# Altium PCB msp_mcu.PcbDoc
Units mil, origin at the board's own origin, x right, y up, seen from the top; angles counter-clockwise.
Board outline 3068 x 1377 mil, 4 copper layers (Top Layer, Signal Layer 1, Signal Layer 2, Bottom Layer), stack 30.634 mil thick; 48 components, 57 nets, 361 pads, 0 vias.
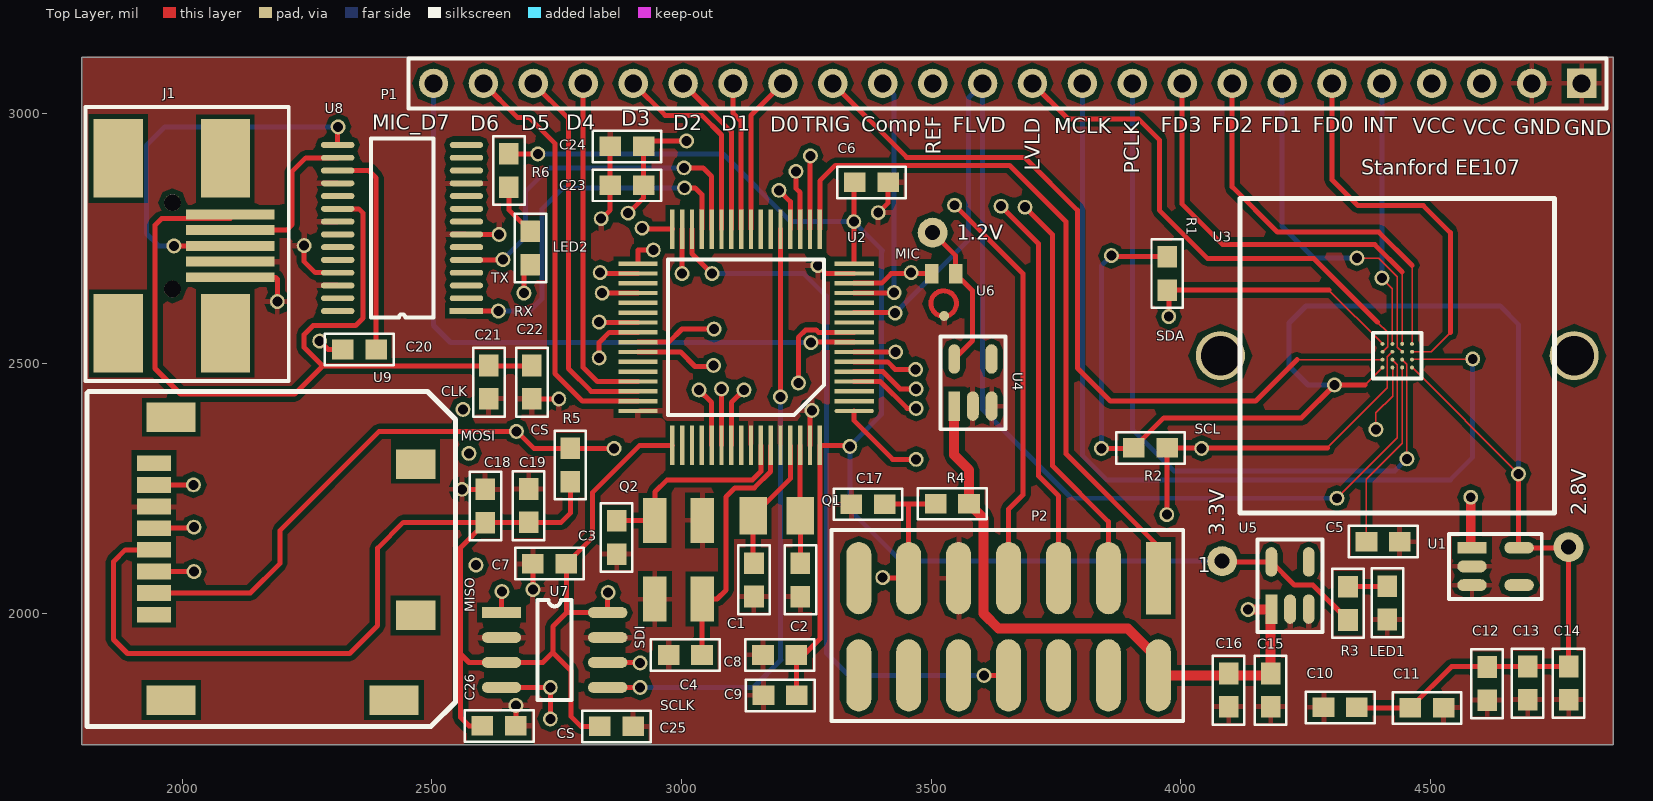
[diagram p0: Top Layer view]
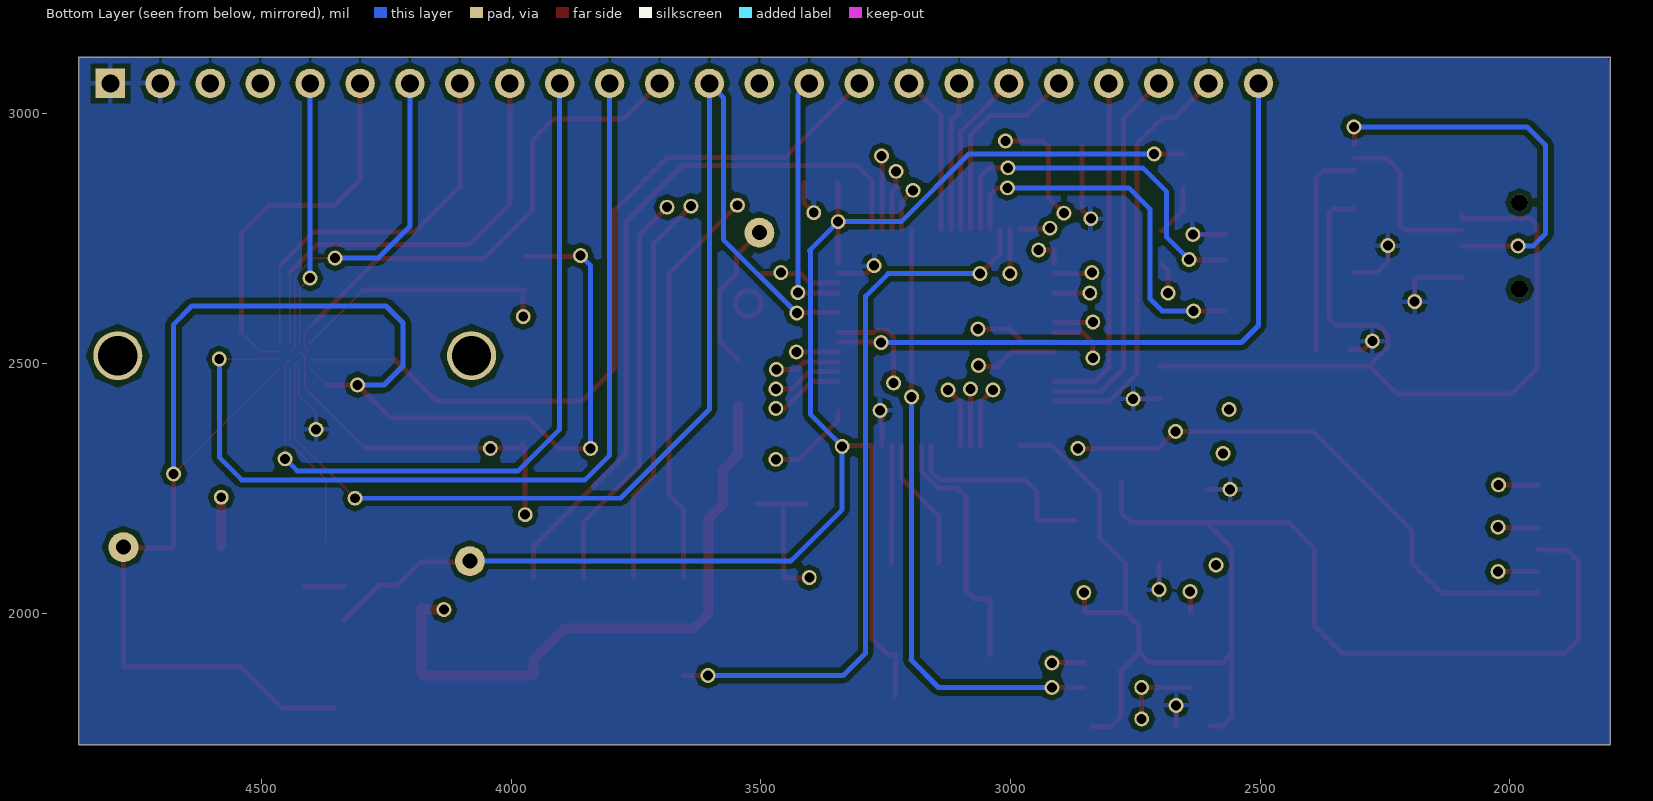
[diagram p1: Bottom Layer view, seen from below]
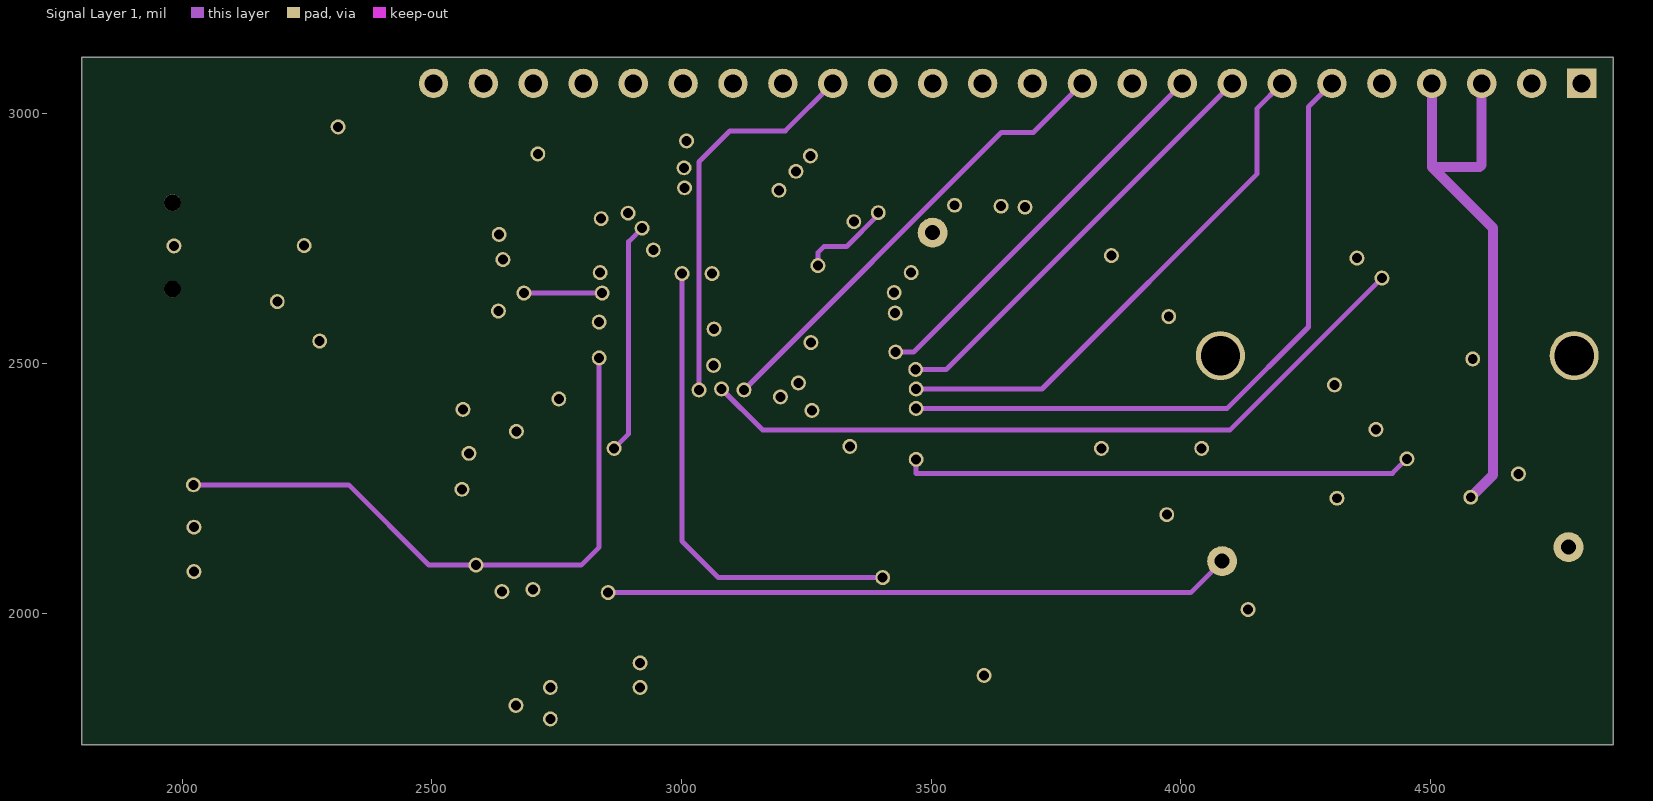
[diagram p2: Signal Layer 1]
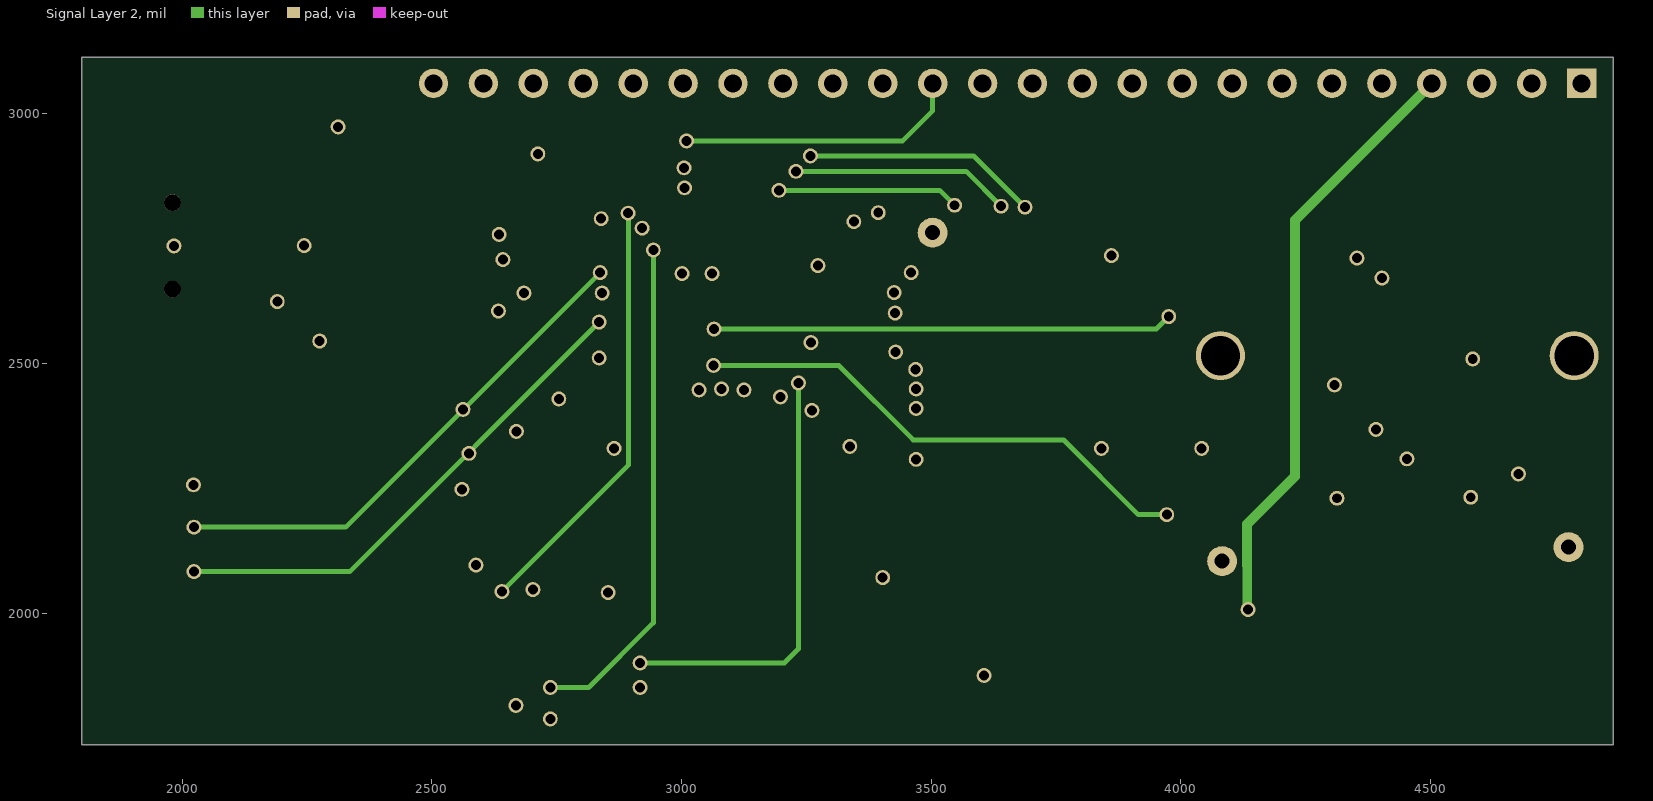
[diagram p3: Signal Layer 2]

## Layer stack, top to bottom
Top Solder: solder mask 0.4, Solder Resist, Dk 3.5
Top Layer: signal copper 1.4
Dielectric 1: core 10, FR-4, Dk 4.2
Signal Layer 1: signal copper 1.417
Dielectric 3: prepreg 5, Dk 4.2
Signal Layer 2: signal copper 1.417
Dielectric 2: core 10, Dk 4.2
Bottom Layer: signal copper 1.4
Bottom Solder: solder mask 0.4, Solder Resist, Dk 3.5

## Board outline
1798,1736 4866,1736 4866,3113 1798,3113

## Design rules (kind name [scope] priority, off if disabled: settings)
Clearance [All] p1: gap=4 ignorepadtopadclearanceinfootprint=FALSE except(5: Arc-THPad Track-THPad; 10: Arc-Fill Arc-Poly Arc-Region Track-Fill Track-Poly Track-Region SMDPad-Fill SMDPad-Poly SMDPad-Region THPad-Fill THPad-Poly THPad-Region Via-Fill Via-Poly Via-Region Fill-Fill Fill-Poly Fill-Region Poly-Poly Poly-Region Region-Region)
PolygonConnect [All] p1: connectstyle=Relief reliefconductorwidth=10 reliefentries=4 polygonreliefangle="90 Angle" airgapwidth=10
RoutingVias [All] p1: holewidth=28 width=50 viastyle="Through Hole" minholewidth=28 minwidth=50 maxholewidth=28 maxwidth=50
SolderMaskExpansion [All] p1: expansion=4
Width [All] p1: maxlimit=30 minlimit=3 preferedwidth=10
30 further rules are at their usual default settings.

## Components (designator, comment, footprint, x,y, rotation, side; value= is the part's Value field where it differs from the comment)
C1 "Cap" 0603 3145,2033.07 r90 top value=22pF
C2 "Cap" 0603 3238,2033 r90 top value=22pF
C3 "Cap" 0603 2870,2118 r90 top value=22pF
C4 "Cap" 0603 2974.07,1916 r0 top value=22pF
C5 "Cap" 0603 4439,2143 r180 top value=0.1uF
C6 "Cap" 0603 3413.93,2863 r180 top value=100nF
C7 "Cap" 0603 2702.07,2099 r0 top value=100nF
C8 "Cap" 0603 3163.07,1916 r0 top value=100nF
C9 "Cap" 0603 3164.07,1835 r0 top value=10uF
C10 "Cap" 0603 4286.07,1811 r0 top value=10uF
C11 "Cap" 0603 4526.93,1810 r180 top value=0.1uF
C12 "Cap" 0603 4614,1825.07 r90 top value=10uF
C13 "Cap" 0603 4695,1826.07 r90 top value=0.1uF
C14 "Cap" 0603 4777,1826 r90 top value=0.1uF
C15 "Cap" 0603 4180,1812.07 r90 top value=10uF
C16 "Cap" 0603 4096,1812.07 r90 top value=0.1uF
C17 "Cap" 0603 3340.07,2218 r0 top value=2.2nF
C18 "Cap" 0603 2607,2247.93 r270 top value=1uF
C19 "Cap" 0603 2693.58,2248.58 r270 top value=100nF
C20 "Cap" 0603 2387.93,2528 r180 top value=0.1uF
C21 "Cap" 0603 2614,2429.07 r90 top value=0.1uF
C22 "Cap" 0603 2700,2429.07 r90 top value=10uF
C23 "Cap" 0603 2857.07,2857 r0 top value=10uF
C24 "Cap" 0603 2857.07,2935 r0 top value=0.1uF
C25 "Cap" 0603 2903,1773 r180 top value=10uF
C26 "Cap" 0603 2667.93,1774 r180 top value=0.1uF
J1 "Mini_USB" Mini_USB 1871.54,2560.42 r90 top
LED1 "LED" 0603 4414,2053.93 r270 top
LED2 "LED" 0603 2697,2764.93 r270 top
P1 "Header 24" HDR1X24 4803,3061 r180 top
P2 "header_14_pad" header_14_pad 3955,2070 r270 top
Q1 "32kHz_crystal" 32kHz_crystal 3238,2195 r180 top
Q2 "ABM3B" ABM3B 2946.51,2185.48 r270 top
R1 "Res" 0603 3972.93,2647 r90 top value=1k
R2 "Res" 0603 3972.93,2331 r180 top value=1k
R3 "Res" 0603 4335,2052.93 r270 top value=1k
R4 "Res" 0603 3509,2219 r0 top value=47k
R5 "Res" 0603 2777,2263 r90 top value=47k
R6 "Res" 0603 2654,2853 r90 top value=1k
U1 "TPS76928DBVR" TPS73633 4583.51,2130.8 r0 top
U2 "MSP430FR5994" MSP430FR5994 3345.75,2404.83 r180 top
U3 "HM01B0" HM01B0 4404.31,2539.24 r0 top
U4 "TPS76912" TPS73633 3546.2,2414.51 r90 top
U5 "TPS76933" TPS73633 4181.6,2008 r90 top
U6 "ICS-40310" ICS-40310 3501,2679.97 r90 top
U7 "DAC8830" DAC8830 2639.4,2001 r0 top
U8 "FT232R" FT232R 2569,2605.05 r180 top
U9 "SD_card_5031821852" SD_card_5031821852 1943,2299.92 r90 top

## Footprints (in the part's own frame and the unit in brackets; to place one, negate y for a bottom-side part, rotate by r counter-clockwise, add the part's x,y. Pads: shape width x height; smd on the part's side, far side on the other; paste and mask are expansions set on the pad)
32kHz_crystal [mm]
  rect 1.4x1.9 smd: 1(0,0) 2(2.4,0)
0603 [mm]
  rect 1.1x1 smd: 1(0,0) 2(1.7,0)
  silkscreen extent -0.9,-0.8 2.6,0.8
ABM3B [mm]
  rect 2.3x1.2 smd: 1(0,0) 2(4,0) 3(4,2.4) 4(0,2.4)
DAC8830 [mm]
  rect 2x0.55 smd: 1(0,0)
  oval 2x0.55 smd: 2(0,-1.27) 3(0,-2.54) 4(0,-3.81) 5(5.4,-3.81) 6(5.4,-2.54) 7(5.4,-1.27) 8(5.4,0)
  silkscreen extent 1.84,-4.44 3.56,0.64
FT232R [mm]
  rect 1.7x0.3 smd: 1(0,0)
  oval 1.7x0.3 smd: 2(0,-0.65) 3(0,-1.3) 4(0,-1.95) 5(0,-2.6) 6(0,-3.25) 7(0,-3.9) 8(0,-4.55) 9(0,-5.2) 10(0,-5.85) 11(0,-6.5) 12(0,-7.15) 13(0,-7.8) 14(0,-8.45) 15(6.55,-8.45) 16(6.55,-7.8) 17(6.55,-7.15) 18(6.55,-6.5) 19(6.55,-5.85) 20(6.55,-5.2) 21(6.55,-4.55) 22(6.55,-3.9) 23(6.55,-3.25) 24(6.55,-2.6) 25(6.55,-1.95) 26(6.55,-1.3) 27(6.55,-0.65) 28(6.55,0)
  silkscreen extent 1.68,-8.78 4.87,0.33
HDR1X24 [mm] "Connector; Header; 24 Position"
  rect 1.5x1.5 hole 0.9: 1(0,0)
  round 1.5 hole 0.9: 2(2.54,0) 3(5.08,0) 4(7.62,0) 5(10.16,0) 6(12.7,0) 7(15.24,0) 8(17.78,0) 9(20.32,0) 10(22.86,0) 11(25.4,0) 12(27.94,0) 13(30.48,0) 14(33.02,0) 15(35.56,0) 16(38.1,0) 17(40.64,0) 18(43.18,0) 19(45.72,0) 20(48.26,0) 21(50.8,0) 22(53.34,0) 23(55.88,0) 24(58.42,0)
  silkscreen extent -1.27,-1.27 59.69,1.27
header_14_pad [mm]
  rect 3.68x1.27 smd: 1(0,0)
  oval 3.68x1.27 smd: 2(4.95,0) 3(0,-2.54) 4(4.95,-2.54) 5(0,-5.08) 6(4.95,-5.08) 7(0,-7.62) 8(4.95,-7.62) 9(0,-10.16) 10(4.95,-10.16) 11(0,-12.7) 12(4.95,-12.7) 13(0,-15.24) 14(4.95,-15.24)
  silkscreen extent -2.45,-16.64 7.27,1.27
HM01B0 [mm]
  round 0.4 on Top Overlay: 25(-1.016,0.254)
  round 0.2 smd mask+0.051: A1(0,0) A2(0.5,0) A3(1,0) A4(1.5,0) B1(0,-0.4) B2(0.5,-0.4) B3(1,-0.4) B4(1.5,-0.4) C1(0,-0.8) C2(0.5,-0.8) C3(1,-0.8) C4(1.5,-0.8) D1(0,-1.2) D2(0.5,-1.2) D3(1,-1.2) D4(1.5,-1.2)
  round 2.5 hole 2: ""(-8.25,-0.6) ""(9.75,-0.6)
  silkscreen extent -7.25,-8.6 8.75,7.4
ICS-40310 [mm]
  rect 1x0.68 smd: 1(0,0) 3(0,-1.22)
  round 0.508 smd: 2(-2.159,-0.635)
  Top Layer lines w0.25: -0.87,-0.61 ccw(c-1.52,-0.61) -0.874,-0.679
Mini_USB [mm]
  round 0.85 hole 0.85: 0(2.25,-2.755) 1(6.65,-2.755)
  rect 0.5x4.5 smd: 1(6.05,-5.7) 2(5.25,-5.7) 3(4.45,-5.7) 4(3.65,-5.7) 5(2.85,-5.7)
  rect 4x2.5 smd: ""(0,0) ""(0,-5.45) ""(8.9,-5.45) ""(8.9,0)
  silkscreen extent -2.42,-8.67 11.53,1.68
MSP430FR5994 [mm]
  oval 2x0.22 smd: 1(0,0)
  rect 2x0.22 smd: 2(0,-0.5) 3(0,-1) 4(0,-1.5) 5(0,-2) 6(0,-2.5) 7(0,-3) 8(0,-3.5) 9(0,-4) 10(0,-4.5) 11(0,-5) 12(0,-5.5) 13(0,-6) 14(0,-6.5) 15(0,-7) 16(0,-7.5) 33(11,-7.5) 34(11,-7) 35(11,-6.5) 36(11,-6) 37(11,-5.5) 38(11,-5) 39(11,-4.5) 40(11,-4) 41(11,-3.5) 42(11,-3) 43(11,-2.5) 44(11,-2) 45(11,-1.5) 46(11,-1) 47(11,-0.5) 48(11,0)
  rect 0.22x2 smd: 17(1.75,-9.25) 18(2.25,-9.25) 19(2.75,-9.25) 20(3.25,-9.25) 21(3.75,-9.25) 22(4.25,-9.25) 23(4.75,-9.25) 24(5.25,-9.25) 25(5.75,-9.25) 26(6.25,-9.25) 27(6.75,-9.25) 28(7.25,-9.25) 29(7.75,-9.25) 30(8.25,-9.25) 31(8.75,-9.25) 32(9.25,-9.25) 49(9.25,1.75) 50(8.75,1.75) 51(8.25,1.75) 52(7.75,1.75) 53(7.25,1.75) 54(6.75,1.75) 55(6.25,1.75) 56(5.75,1.75) 57(5.25,1.75) 58(4.75,1.75) 59(4.25,1.75) 60(3.75,1.75) 61(3.25,1.75) 62(2.75,1.75) 63(2.25,1.75) 64(1.75,1.75)
  silkscreen extent 1.54,-7.71 9.46,0.21
SD_card_5031821852 [mm]
  rect 0.8x1.75 smd: 1(-7.7,0) 2(-6.6,0) 3(-5.5,0) 4(-4.4,0) 5(-3.3,0) 6(-2.2,0) 7(-1.1,0) 8(0,0)
  rect 1.5x2.5 smd: PAD(-12.045,-0.875) PAD(-12.045,-12.214) PAD(2.345,-0.875)
  rect 1.5x2 smd: PAD(-7.74,-13.314) PAD(-0.04,-13.314)
  silkscreen extent -13.39,-15.34 3.66,3.4
TPS73633 [mm]
  rect 1.5x0.6 smd: 1(0,0)
  oval 1.5x0.6 smd: 2(0,-0.95) 3(0,-1.9) 4(2.4,-1.9) 5(2.4,0)
  silkscreen extent -1.17,-2.6 3.55,0.7

## Part data
C1 C2 C3 C4 C5 C6 C7 C8 C9 C10 C11 C12 C13 C14 C15 C16 C17 C18 C19 C20 C21 C22 C23 C24 C25 C26: "Ceramic Capacitor (Surface Mount)", Manufacturer="Generic Ceramic Chip Cap (TBD)"
P1: "Header, 24-Pin", LatestRevisionDate=17-Jul-2002, LatestRevisionNote="Re-released for DXP Platform.", Publisher="Altium Limited"
R1 R2 R3 R4 R5 R6: "Chip Resistor (Surface Mount)", Manufacturer="Generic Chip Res (TBD)"
U1 U4 U5: "TPS73633"

## Free pads (board coordinates)
  round 30 hole 20: 2(1983,2735.61) 2(2022,2257) 2(2023,2083) 2(2023,2172) 2(2190,2624) 2(2244,2736) 2(2275,2545) 2(2312,2974) 2(2560,2247.93) 2(2562,2408) 2(2574,2320) 2(2588,2096) 2(2632.95,2605.05) 2(2634.59,2758.59) 2(2640,2043) 2(2642,2708) 2(2668,1815) 2(2669,2364) 2(2684,2641) 2(2702,2047) 2(2712,2920) 2(2737,1788) 2(2737,1851) 2(2754,2429) 2(2835,2511) 2(2835,2583) 2(2837,2682) 2(2839,2790) 2(2841,2641) 2(2853,2041) 2(2864.93,2329.93) 2(2893,2801) 2(2917,1851) 2(2917,1900) 2(2921,2771) 2(2943.32,2727.32) 2(3001,2680) 2(3005,2892) 2(3006,2852) 2(3010,2946) 2(3035,2447) 2(3061,2680) 2(3064,2496) 2(3065,2569) 2(3080,2449) 2(3125,2447) 2(3195,2847) 2(3198.11,2433.11) 2(3229,2885) 2(3234,2461) 2(3258,2916) 2(3259,2542) 2(3261,2406) 2(3273,2696) 2(3337,2334) 2(3345,2784) 2(3394,2802) 2(3403,2071) 2(3426,2642) 2(3428,2601) 2(3429,2523) 2(3460,2682) 2(3469,2488) 2(3470,2308) 2(3470,2410) 2(3470,2449) 2(3547,2817) 2(3606,1875) 2(3640,2815) 2(3688,2813) 2(3841,2330) 2(3861,2716) 2(3972,2197) 2(3976,2594) 2(4042,2330) 2(4135,2007) 2(4308,2457) 2(4313,2230) 2(4353,2711) 2(4391,2368) 2(4403,2671) 2(4453,2309) 2(4581,2232) 2(4585,2509) 2(4676.49,2278.88)
  round 60 hole 30: 3(4083,2104) 4(4777,2132) 5(3503,2762)

## Nets (pads, with @x,y where several pads share a name; then routed paths per layer and width w, separated by ;. In a path a pad name is that pad's centre, name@x,y a point inside that pad or via, vN(x,y) a via of type N, cw(c..) or ccw(c..) an arc to the next point about the centre after c; other vN are vias at no path point)
\R\S\T\: C17.2 P2.11 pad.2@3001,2680 pad.2@3403,2071 R4.1 U2.31 | length 1360.2
  Top Layer w10: pad.2@3001,2680 3001.26,2680.26 U2.31 ; pad.2@3403,2071 3404,2070 P2.11 3455,2218 ; C17.2 3455,2218 ; R4.1 3508,2218 3455,2218
  Signal Layer 1 w10: pad.2@3001,2680 3001,2144 3074,2071 pad.2@3403,2071
comparator: P1.15 pad.2@3426,2642 U2.13 | length 509.2
  Top Layer w10: U2.13 3425.05,2641.05 pad.2@3426,2642
  Bottom Layer w10: P1.15 3426,3038 pad.2@3426,2642
D0: P1.6 pad.2@3470,2410 U2.4 U3.B4 | length 2274
  Top Layer w3: U3.B4 4501.5,2523.5 4540,2562
  Top Layer w10: U2.4 3398.12,2463.88 3452,2410 pad.2@3470,2410 ; P1.6 4303,2868 4355,2816 4486,2816 4540,2762 4540,2562
  Signal Layer 1 w10: pad.2@3470,2410 4093,2410 4256,2573 4256,3014 P1.6
D1: P1.7 pad.2@3470,2449 pad.2@4353,2711 U2.5 U3.B3 | length 1916.2
  Top Layer w3: pad.2@4352,2711 4353,2711 4397,2711 4434.19,2673.82 4434.19,2533 U3.B3
  Top Layer w10: U2.5 3403.43,2483.57 3438,2449 pad.2@3470,2449
  Signal Layer 1 w10: pad.2@3470,2449 3722,2449 4153,2880 4153,3011 P1.7
  Bottom Layer w10: P1.7 4203,2775 4267,2711 pad.2@4353,2711
D2: P1.8 pad.2@3469,2488 U2.6 U3.A4 | length 1790.9
  Top Layer w3: U3.A4 4463.37,2696.63
  Top Layer w10: U2.6 3412.75,2503.25 3428,2488 pad.2@3469,2488 ; P1.8 4103,2854 4194,2763 4397,2763 4463.37,2696.63
  Signal Layer 1 w10: pad.2@3469,2488 3530,2488 P1.8
D3: P1.9 pad.2@3429,2523 U2.7 U3.A3 | length 1763.1
  Top Layer w3: U3.A3 4443.69,2683.32
  Top Layer w10: U2.7 3428.94,2522.94 pad.2@3429,2523 ; P1.9 4003,2819 4084,2738 4389,2738 4443.69,2683.32
  Signal Layer 1 w10: pad.2@3429,2523 3465,2523 P1.9
DAC_C\S\: pad.2@2737,1788 pad.2@2737,1851 pad.2@2943.32,2727.32 U2.33 U7.4 | length 1225.4
  Top Layer w10: U7.4 2737,1851 pad.2@2737,1788 ; U2.33 2912.68,2727.32 pad.2@2943.32,2727.32
  Signal Layer 2 w10: pad.2@2737,1851 2814,1851 2943.32,1980.32 pad.2@2943.32,2727.32
DAC_SCLK: pad.2@2917,1851 pad.2@3198.11,2433.11 U2.21 U7.5 | length 1233.2
  Top Layer w10: U7.5 pad.2@2917,1851 ; pad.2@3198.11,2433.11 U2.21
  Bottom Layer w10: pad.2@2917,1851 3144,1851 3199,1906 3198.11,1906.89 pad.2@3198.11,2433.11
DAC_SDI: pad.2@2917,1900 pad.2@3234,2461 U2.9 U7.6 | length 1138.1
  Top Layer w10: U7.6 2916,1901 pad.2@2917,1900 ; pad.2@3234,2461 3234,2552.36 3248.64,2567 3269.36,2567 3274.05,2562.31 U2.9
  Signal Layer 2 w10: pad.2@2917,1900 3206,1900 3234,1928 pad.2@3234,2461
FVLD: P1.13 pad.2@3428,2601 pad.2@4313,2230 U2.11 U3.C2 | length 2383.8
  Top Layer w3: pad.2@4313,2230 4434,2351 4434,2497.75 U3.C2
  Top Layer w10: U2.11 3427.32,2601.68 pad.2@3428,2601
  Bottom Layer w10: pad.2@3428,2601 3575,2748 3575,3033 P1.13 3603,2408 3781,2230 pad.2@4313,2230
GND: C1.1 C2.1 C3.1 C4.1 C5.1 C6.1 C7.1 C8.1 C9.1 C10.1 C11.1 C12.1 C13.1 C14.1 C15.1 C16.1 C17.1 C18.1 C19.1 C20.2 C21.1 C22.1 C23.1 C24.1 C25.1 C26.1 J1.4 J1.5 LED1.2 P1.1 P1.2 P2.9 pad.2@2190,2624 pad.2@2244,2736 pad.2@2275,2545 pad.2@2560,2247.93 pad.2@2634.59,2758.59 pad.2@2668,1815 pad.2@2702,2047 pad.2@2754,2429 pad.2@2839,2790 pad.2@3261,2406 pad.2@3273,2696 pad.2@3394,2802 pad.2@4391,2368 Q2.2 Q2.4 U1.2 U1.3 U2.15 U2.48 U2.57 U2.60 U2.63 U3.D2 U4.2 U4.3 U5.2 U5.3 U6.2 U7.2 U7.7 U8.7 U8.11 U8.18 U8.21 U8.25 U8.26 U9.6 | length 1256.3
  Top Layer w3: pad.2@4391,2367 4391,2368 4391,2401 4424.5,2434.5 4424.5,2491.5 U3.D2
  Top Layer w10: J1.5 2186.38,2672.62 2190,2669 pad.2@2190,2624 ; pad.2@2244,2736 2244,2704 2266.18,2681.82 U8.25 ; pad.2@2275,2545 2292,2528 C20.2 ; pad.2@2560,2247.93 C18.1 ; U8.7 pad.2@2634.59,2758.59 ; C26.1 2667.93,1814.93 pad.2@2668,1815 ; C22.1 2753.93,2429.07 pad.2@2754,2429 ; pad.2@2702,2047 2702.07,2047.07 C7.1 ; pad.2@2839,2790 2857.07,2807.07 C23.1 C24.1 ; U2.63 3257.16,2402.16 pad.2@3261,2406 ; pad.2@3273,2696 3288.58,2680.42 U2.15 ; pad.2@3394,2802 3413.93,2821.93 C6.1
  Signal Layer 1 w10: pad.2@3273,2696 3273,2722 3285,2734 3330.36,2734 3394,2797.64 pad.2@3394,2802
INT: P1.5 pad.2@3080,2449 pad.2@4403,2671 U2.54 U3.A2 | length 2126.4
  Top Layer w3: pad.2@4403,2671 4424,2650 U3.A2
  Top Layer w10: U2.54 pad.2@3080,2449
  Signal Layer 1 w10: pad.2@3080,2449 3162,2367 4099,2367 pad.2@4403,2671
  Bottom Layer w10: pad.2@4403,2671 P1.5
LED2: LED2.2 pad.2@2684,2641 pad.2@2841,2641 U2.36 | length 291.1
  Top Layer w10: pad.2@2684,2641 2684,2685 LED2.2 ; pad.2@2841,2641 2841.05,2641.05 U2.36
  Signal Layer 1 w10: pad.2@2684,2641 pad.2@2841,2641
LVLD: P1.12 U3.B1 | length 1043.8
  Top Layer w3: 4394,2583 4414.5,2562.5 4414.5,2533.68 U3.B1
  Top Layer w10: P1.12 3774,2990 3915,2990 3957,2948 3957,2807 4054,2710 4267,2710 4394,2583
MCLK: P1.11 pad.2@3125,2447 pad.2@4585,2509 U2.55 U3.C4 | length 2943.2
  Top Layer w3: U3.C4@4463,2508 pad.2@4589.38,2508
  Top Layer w10: U2.55 3099.68,2421.68 pad.2@3125,2447
  Signal Layer 1 w10: pad.2@3125,2447 3641,2963 3705,2963 P1.11
  Bottom Layer w10: P1.11 3803,2316 3852,2267 4540,2267 4585,2312 pad.2@4585,2509
MIC_D0: P1.17 U2.24 | length 318.5
  Top Layer w10: U2.24 3139.05,2997.05 P1.17
MIC_D1: P1.18 U2.25 | length 298.8
  Top Layer w10: P1.18 3103,3001 3119.37,2984.63 U2.25
MIC_D2: P1.19 U2.26 | length 332
  Top Layer w10: P1.19 3099.68,2964.32 U2.26
MIC_D3: P1.20 U2.27 | length 408.4
  Top Layer w10: P1.20 2967,2997 3040.63,2997 3080,2957.63 U2.27
MIC_D4: P1.21 U2.45 | length 690.3
  Top Layer w10: P1.21 2803,2492 2831.12,2463.88 U2.45
MIC_D5: P1.22 U2.46 | length 758.6
  Top Layer w10: P1.22 2773,2991 2773,2490 2818.8,2444.2 U2.46
MIC_D6: P1.23 U2.47 | length 843.4
  Top Layer w10: P1.23 2671,2993 2694,2993 2746,2941 2746,2480 2801.49,2424.51 U2.47
MIC_D7: P1.24 pad.2@3259,2542 U2.8 | length 1342.1
  Top Layer w10: pad.2@3259,2542 3259.62,2542.62 U2.8
  Bottom Layer w10: P1.24 2503,2576 2537,2542 pad.2@3259,2542
MIC_OUT: pad.2@3460,2682 U2.14 U6.1 | length 163.2
  Top Layer w10: U2.14 3400.73,2660.73 3419.97,2679.97 U6.1
NetC1_2: C1.2 Q1.2 U2.61 | length 267.3
  Top Layer w10: C1.2 3143.51,2101.49 Q1.2 3217.8,2269.28 U2.61
NetC2_2: C2.2 Q1.1 U2.62 | length 236.2
  Top Layer w10: U2.62 3237.48,2195.52 Q1.1 C2.2
NetC3_2: C3.2 Q2.1 U2.58 | length 415.3
  Top Layer w10: C3.2 2870.55,2185.48 Q2.1 2946.51,2242.51 2971,2267 3142,2267 3158.74,2283.74 U2.58
NetC4_2: C4.2 Q2.3 U2.59 | length 517.2
  Top Layer w10: C4.2 Q2.3 3071,2028 3089,2046 3089,2233 3107,2251 3145.8,2251 3178.43,2283.63 U2.59
NetC5_2: C5.2 U3.D3 | length 378.7
  Top Layer w3: C5.2 4372.07,2268.07 4443.69,2339.68 U3.D3
NetC20_1: C20.1 U8.17 | length 426.9
  Top Layer w10: U8.17 2373.46,2886.54 2387.93,2872.07 C20.1
NetC21_2: 
NetLED1_1: LED1.1 R3.1 | length 79.4
  Top Layer w10: R3.1 4413,2052.93 LED1.1
NetLED2_1: LED2.1 R6.1 | length 105.9
  Top Layer w10: R6.1 2654,2807.93 LED2.1
P1.6_SD_MOSI: pad.2@2023,2083 pad.2@2574,2320 pad.2@2835,2583 U2.39 U9.3 | length 1177.4
  Top Layer w10: U9.3 2022.61,2083.39 pad.2@2023,2083 ; pad.2@2835,2583 2836.01,2581.99 U2.39
  Signal Layer 2 w10: pad.2@2023,2083 2335,2083 pad.2@2835,2583
P1.7_SD_MISO: pad.2@2022,2257 pad.2@2588,2096 pad.2@2835,2511 U2.40 U9.7 | length 1469.8
  Top Layer w10: U9.7 2021.61,2256.61 pad.2@2022,2257 ; pad.2@2835,2511 2835,2542 2855.31,2562.31 U2.40
  Signal Layer 1 w10: pad.2@2022,2257 2333,2257 2494,2096 2588,2096 2799,2096 2835,2132 pad.2@2835,2511
P2.0_SD_CS: pad.2@2669,2364 pad.2@2864.93,2329.93 pad.2@2921,2771 R5.2 U2.32 U9.2 | length 1632.7
  Top Layer w10: U9.2 2136.08,2040.08 2195,2099 2195,2165 2394,2364 2669,2364 2670,2364 2704.07,2329.93 R5.2 pad.2@2864.93,2329.93 ; pad.2@2922,2769 U2.32
  Signal Layer 1 w10: pad.2@2864.93,2329.93 2894,2359 2894,2744 pad.2@2921,2771
P2.2_SD_SPICLK: pad.2@2023,2172 pad.2@2562,2408 pad.2@2837,2682 U2.34 U9.5 | length 1182.4
  Top Layer w10: U9.5 2021,2170 pad.2@2023,2172 ; pad.2@2837,2682 2838.58,2680.42 U2.34
  Signal Layer 2 w10: pad.2@2023,2172 2327,2172 pad.2@2837,2682
PCLKO: P1.10 pad.2@3470,2308 pad.2@4453,2309 U2.1 U3.C3 | length 2688.9
  Top Layer w3: U3.C3 4453,2498.43 4453,2496.03 4453.12,2495.91 4453.12,2488.09 4453,2487.97 pad.2@4453,2309
  Top Layer w10: U2.1 3345.75,2385.25 3423,2308 pad.2@3470,2308
  Signal Layer 1 w10: pad.2@3470,2308 3470,2280 4424,2280 pad.2@4453,2309
  Bottom Layer w10: P1.10 3903,2368 3986,2285 4429,2285 pad.2@4453,2309
ref_vol: C23.2 C24.2 P1.14 pad.2@2640,2043 pad.2@2893,2801 pad.2@3010,2946 U7.1 | length 1715.7
  Top Layer w10: U7.1 2639.4,2042.4 pad.2@2640,2043 ; pad.2@2893,2801 2924,2832 C23.2 C24.2 2935,2946 pad.2@3010,2946
  Signal Layer 2 w10: pad.2@2640,2043 2894,2297 pad.2@2894,2801 ; pad.2@3010,2946 3443,2946 3503,3006 P1.14
SCL: pad.2@3064,2496 pad.2@3972,2197 pad.2@4042,2330 R2.1 U2.42 U3.B2 | length 1898.6
  Top Layer w3: 4294,2331 4414,2451 4414,2513.5 U3.B2
  Top Layer w10: U2.42 2998.06,2522.94 3027,2494 pad.2@3064,2494 ; pad.2@3972,2197 3972.93,2197.93 R2.1 ; R2.1@3975,2340 3984,2331 4294,2331
  Signal Layer 2 w10: pad.2@3064,2496 3315,2496 3464,2347 3765,2347 3915,2197 pad.2@3972,2197
SDA: pad.2@3065,2569 pad.2@3976,2594 R1.1 U2.41 U3.A1 | length 1614.9
  Top Layer w3: 4296.56,2647 U3.A1
  Top Layer w10: U2.41 2974.62,2542.62 3001,2569 pad.2@3065,2569 ; pad.2@3976,2594 3976,2643.93 R1.1 4296.56,2647
  Signal Layer 2 w10: pad.2@3065,2569 3951,2569 pad.2@3976,2594
TCK: P2.7 pad.2@3195,2847 pad.2@3547,2817 U2.20 | length 1267.6
  Top Layer w10: pad.2@3195,2847 3217.8,2824.2 U2.20 ; pad.2@3547,2817 3684,2680 3684,2237 3655,2208 P2.7
  Signal Layer 2 w10: pad.2@3195,2847 3517,2847 pad.2@3547,2817
TDI: P2.3 pad.2@3258,2916 pad.2@3688,2813 U2.18 | length 1432.2
  Top Layer w10: U2.18 3257.16,2915.16 pad.2@3258,2916 ; pad.2@3688,2813 3743,2758 3743,2295 3855,2183 P2.3
  Signal Layer 2 w10: pad.2@3258,2916 3585,2916 pad.2@3688,2813
TDO: P2.1 U2.17 | length 1440.3
  Top Layer w10: U2.17 3276.85,2865.85 3308,2897 3657,2897 3770,2784 3770,2319 3955,2134 P2.1
TEST: P2.8 pad.2@3061,2680 pad.2@3606,1875 U2.30 | length 1451.9
  Top Layer w10: U2.30 3020.95,2720.05 pad.2@3061,2680 ; pad.2@3606,1875 3606.12,1875.12 P2.8
  Bottom Layer w10: pad.2@3061,2680 3245,2680 3290,2635 3290,1920 3335,1875 pad.2@3606,1875
TMS: P2.5 pad.2@3229,2885 pad.2@3640,2815 U2.19 | length 1352.1
  Top Layer w10: pad.2@3229,2885 3229,2851 3237.48,2842.52 U2.19 ; pad.2@3640,2815 3715,2740 3715,2275 3755,2235 P2.5
  Signal Layer 2 w10: pad.2@3229,2885 3570,2885 pad.2@3640,2815
TRIG: P1.16 pad.2@3035,2447 U2.53 U3.C1 | length 2495.7
  Top Layer w3: 4232.75,2507.75 U3.C1
  Top Layer w10: pad.2@3035,2447 3060.32,2421.68 U2.53 ; P1.16 3451,2913 3687,2913 3793,2807 3793,2491 3859,2425 4150,2425 4232.75,2507.75
  Signal Layer 1 w10: pad.2@3035,2447 3035,2904 3097,2966 3208,2966 P1.16
UART_RX: pad.2@2632.95,2605.05 pad.2@3006,2852 U2.29 U8.1 | length 754.4
  Top Layer w10: U8.1 pad.2@2632.95,2605.05 ; pad.2@3006,2852 3027,2852 3040.63,2838.37 U2.29
  Bottom Layer w10: pad.2@2632.95,2605.05 2696.05,2605.05 2720,2629 2720,2809 2763,2852 pad.2@3006,2852
UART_TX: pad.2@2642,2708 pad.2@3005,2892 U2.28 U8.5 | length 733.9
  Top Layer w10: U8.5 2641.41,2707.41 pad.2@2642,2708 ; pad.2@3005,2892 3043,2892 3060.32,2874.68 U2.28
  Bottom Layer w10: pad.2@2642,2708 2687,2753 2687,2844 2735,2892 pad.2@3005,2892
USB_D+: J1.3 pad.2@1983,2735.61 pad.2@2312,2974 U8.15 | length 797.4
  Top Layer w10: pad.2@1976.61,2735.61 1983,2735.61 J1.3 ; U8.15 2311.13,2973.13 pad.2@2312,2974
  Bottom Layer w10: pad.2@1983,2735.61 1952.39,2735.61 1928,2760 1928,2937 1965,2974 pad.2@2312,2974
USB_D-: J1.2 U8.16 | length 337.9
  Top Layer w10: J1.2 2209.11,2767.11 2220,2778 2220,2885 2247.13,2912.13 U8.16
VCC: C15.2 C16.2 P1.3 P1.4 P2.2 pad.2@4135,2007 pad.2@4581,2232 R4.2 U1.1 U4.1 U5.1 | length 3750.9
  Top Layer w10: U1.1@4581,2133.32 U1.1 ; pad.2@4581,2232 pad.2@4582,2231
  Top Layer w20: U4.1 3546.2,2316.8 3575.93,2287.07 R4.2 3604.5,2190.43 3604.5,1999.5 3635,1969 3894,1969 3955,1908 P2.2 4176.12,1875.12 C15.2 U5.1@4180,2007 ; pad.2@4135,2007 U5.1@4180,2007 ; U5.1@4180,2010.4 U5.1@4180,2007 ; U5.1 4180.6,2007 U5.1@4180,2007 ; U1.1@4581,2133.32 pad.2@4581,2232
  Signal Layer 1 w20: P1.4 4503,2894 ; pad.2@4581,2232 4626,2277 4626,2771 4503,2894 ; P1.3@4611,3053 P1.3 4603,2898 4599,2894 4503,2894
  Signal Layer 2 w20: pad.2@4133.25,2007 4133,2178 4229,2274 4229,2787 P1.4
VCC2_8: C10.2 C11.2 C12.2 C13.2 C14.2 pad.2@3841,2330 pad.2@3861,2716 pad.2@4308,2457 pad.2@4676.49,2278.88 pad.4 R1.2 R2.2 U1.5 U3.D1 U3.D4 | length 3367.4
  Top Layer w3: 4369.31,2457 U3.D1 ; U3.D4 pad.2@4676.49,2278.88
  Top Layer w10: pad.2@3841,2330 3905,2330 R2.2 3966,2391 4242,2391 4308,2457 4369.31,2457 ; pad.2@3861,2716 3863.07,2713.93 R1.2 ; C10.2 4354,1810 C11.2 4542.93,1892.93 C14.2 pad.4 4775.8,2130.8 U1.5 4676.49,2132.32 pad.2@4676.49,2278.88
  Bottom Layer w10: pad.2@3842,2331 3841,2330 3841,2696 pad.2@3861,2716 ; pad.2@4308,2457 4255,2457 4217,2495 4217,2581 4251,2615 4640,2615 4676.49,2578.51 pad.2@4676.49,2278.88
VCC_1_2: pad.5 U4.5 U6.3 | length 301.4
  Top Layer w10: pad.5 3549.03,2715.97 U6.3 3583,2646 3583,2545.8 U4.5
VCC_3_3: C6.2 C7.2 C8.2 C9.2 C18.2 C19.2 C25.2 C26.2 pad.2@2712,2920 pad.2@2853,2041 pad.2@3337,2334 pad.2@3345,2784 pad.3 R3.2 R5.1 R6.2 U2.16 U2.49 U2.64 U5.5 U7.3 U7.8 U9.4 | length 7466.5
  Top Layer w10: U9.4@1943.31,2127 U9.4 1885.69,2126.69 1862,2103 1862,1947 1890,1919 2335,1919 2391,1975 2391,2130 2442.65,2181.65 C19.2 2758.65,2181.65 2777,2200 R5.1 ; C26.2 2574,1774 2557,1791 2557,1918 ; C18.2 2557,2131 2557,1918 ; R6.2 2711.93,2919.93 pad.2@2712,2920 ; C25.2 2798,1773 2778,1793 2778,1885 2742,1921 ; pad.2@2853,2041 2852,2040 U7.8 2770,2001 ; U2.49 2915.93,2335.93 2822,2242 2822,2152 C7.2 2769,2002 2770,2001 ; C9.2 3230,1836 C8.2 3245,1916 3276.85,1947.85 U2.64 3335.07,2335.93 pad.2@3337,2334 ; U2.16 3345.75,2861.75 C6.2 ; pad.3 4084.51,2102.49 U5.5 4228.09,2056 4265,2056 R3.2 ; 2557,1918 2574,1901 U7.3 2722,1901 2742,1921 ; 2742,1921 2742,1973 2770,2001
  Signal Layer 1 w10: pad.2@2853,2041 4020,2041 pad.3
  Bottom Layer w10: pad.2@2712,2920 3083,2920 3219,2784 3345,2784 3403,2726 3401,2724 3401,2398 3337,2334 3337,2207 3440,2104 pad.3
VCC_USB: C21.2 C22.2 J1.1@2095.94,2798.61 U8.20 | length 1726.2
  Top Layer w10: J1.1@2095.94,2798.61 2095.94,2790 1958,2790 1945,2777 1945,2490 1996,2439 2225,2439 2281,2495 ; U8.20 2353.23,2809.77 2362,2801 2362,2591 2347,2576 2262,2576 2244,2558 2244,2532 2281,2495 ; C22.2 2699,2495 2281,2495
VCC_USB_3_3: U8.4
pads on no net: J1. J1.0 J1.1@1980,2822.23 P2.4 P2.6 P2.10 P2.12 P2.13 P2.14 U1.4 U2.2 U2.3 U2.10 U2.12 U2.22 U2.23 U2.35 U2.37 U2.38 U2.43 U2.44 U2.50 U2.51 U2.52 U2.56 U3. U3.25 U4.4 U5.4 U8.2 U8.3 U8.6 U8.8 U8.9 U8.10 U8.12 U8.13 U8.14 U8.19 U8.22 U8.23 U8.24 U8.27 U8.28 U9.1 U9.8 U9.PAD

## Polygon pours and split planes (outlines as drawn)
GND on Top Layer "GND" (solid, pour order 74): 1798,3114 1800,3112 1800,1737 4868,1737 4866,1739 4866,3114 1801,3114 1798,3111
GND on Bottom Layer "GND" (solid, pour order 76): 1798,3111 1800,3109 1800,1735 4866,1735 4864,1737 4864,3113 1805,3113 1802,3116

## Silkscreen, mask and mechanical layers (free items; w line width, h text height)
Top Overlay:
  text "D3" at 2879,2976 h30
  text "MIC_D7" at 2380,2968 h30
  text "D4" at 2769,2968 h30
  text "D5" at 2679,2967 h30
  text "D2" at 2983,2967 h30
  text "D6" at 2577,2966 h30
  text "D1" at 3079,2966 h30
  text "D0" at 3178,2964 h30
  text "TRIG" at 3242,2964 h30
  text "Comp" at 3360,2964 h30
  text "FLVD" at 3543,2963 h30
  text "FD3" at 3960,2963 h30
  text "FD2" at 4063,2963 h30
  text "FD1" at 4161,2963 h30
  text "FD0" at 4264,2963 h30
  text "INT" at 4366,2963 h30
  text "MCLK" at 3747,2961 h30
  text "VCC" at 4465,2961 h30
  text "GND" at 4667,2959 h30
  text "VCC" at 4566,2958 h30
  text "GND" at 4768,2957 h30
  text "REF" at 3519,2918 h30 r90
  text "LVLD" at 3718,2886 h30 r90
  text "PCLK" at 3917,2880 h30 r90
  text "Stanford EE107" at 4362,2878 h30
  text "1.2V" at 3551,2748 h30
  text "MIC" at 3428,2710 h20
  text "TX" at 2619,2662 h20
  text "RX" at 2665,2595 h20
  text "SDA" at 3951,2546 h20
  text "CLK" at 2519,2434 h20
  text "SCL" at 4028,2359 h20
  text "CS" at 2698,2357 h20
  text "MOSI" at 2558,2345 h20
  text "2.8V" at 4812,2196 h30 r90
  text "3.3V" at 4087,2155 h30 r90
  text "MISO" at 2586,2002 h20 r90
  text "SDI" at 2926,1928 h20 r90
  text "SCLK" at 2957,1805 h20
  text "CS" at 2750,1749 h20
Mechanical 1:
  lines w10: 1798,1736 4864,1736 4864,3113 1798,3113 1798,1736

## Text inside footprints (layer, text, board x,y; h text height)
P2: Top Overlay "1" at 4034,2082 h30